# Altium PCB l2-l3-front.PcbDoc
Units mm, origin at the board's own origin, x right, y up, seen from the top; angles counter-clockwise.
Board outline 67.5 x 16.75 mm, 2 copper layers (Top Layer, Bottom Layer); 15 components, 19 nets, 77 pads, 39 vias.
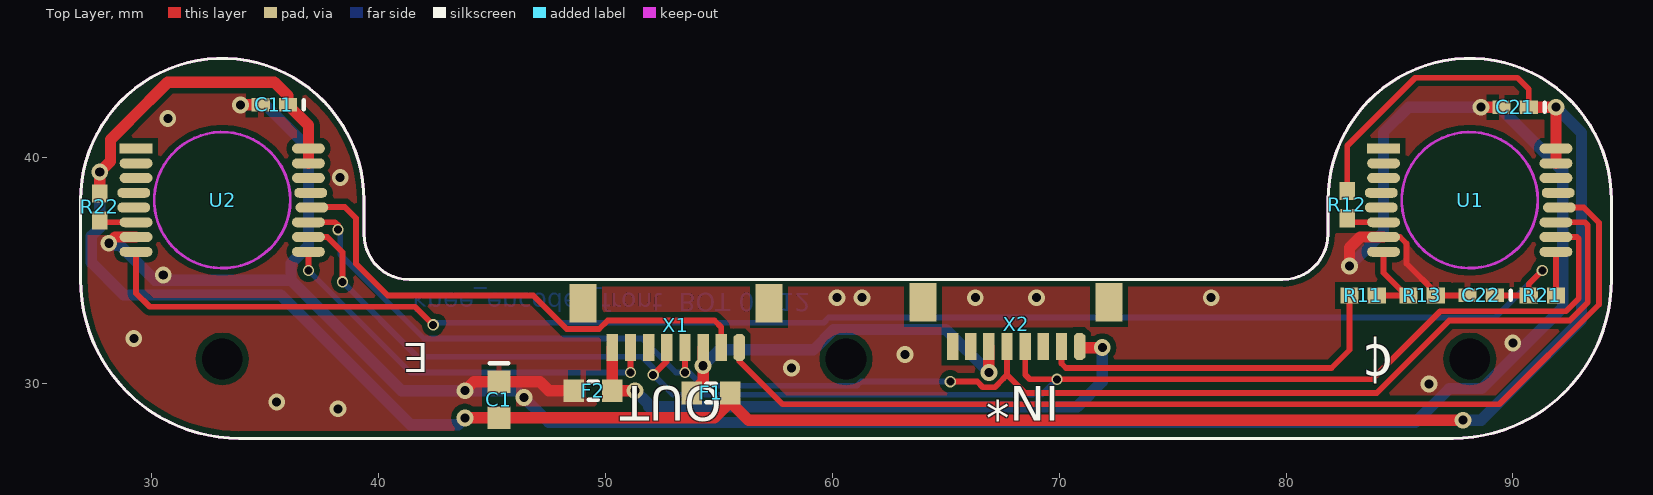
[diagram p0: Top Layer view]
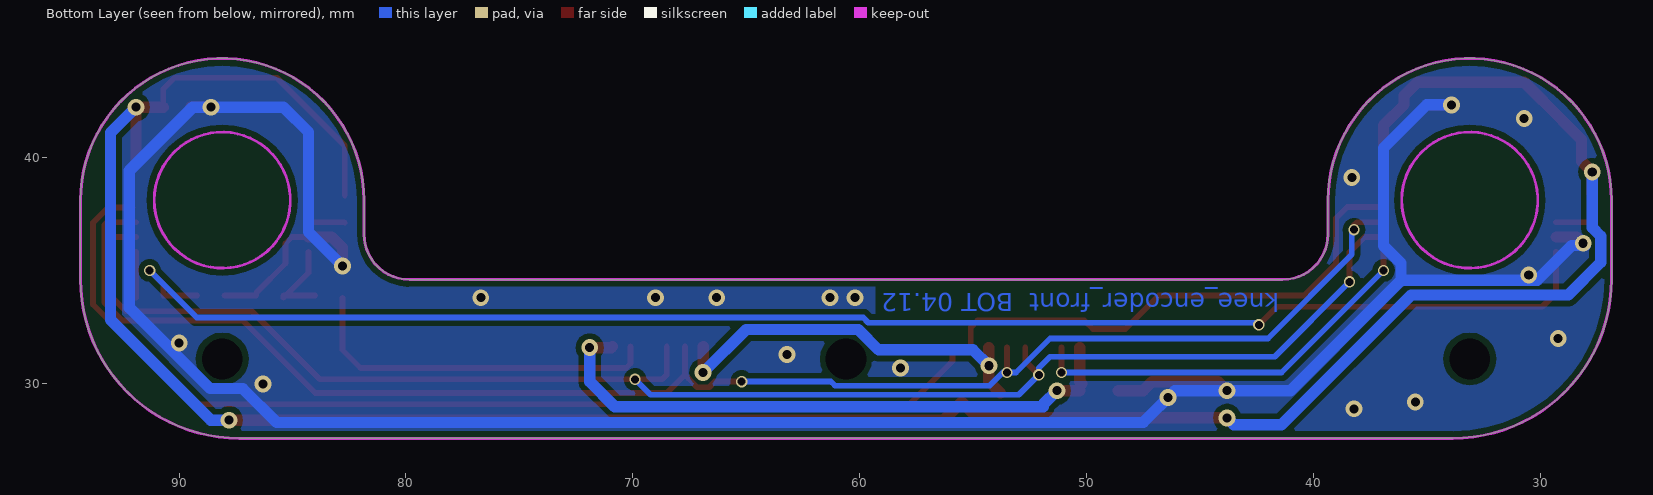
[diagram p1: Bottom Layer view, seen from below]

## Layer stack, top to bottom
Top Solder: solder mask 0.0102, Solder Resist, Dk 3.5
Top Layer: signal copper 0.0356
Dielectric1: dielectric 0.32, FR-4, Dk 4.8
Bottom Layer: signal copper 0.0356
Bottom Solder: solder mask 0.0102, Solder Resist, Dk 3.5

## Board outline
26.85,34.6 26.85,38.1 cw(c33.1,38.1) 39.35,38.1 39.35,36.6 ccw(c41.35,36.6) 41.35,34.6 79.85,34.6 ccw(c79.85,36.6) 81.85,36.6 81.85,38.1 cw(c88.1,38.1) 94.35,38.1 94.35,34.6 cw(c87.35,34.6) 87.35,27.6 33.85,27.6 cw(c33.85,34.6)

## Design rules (kind name [scope] priority, off if disabled: settings)
Clearance Clearance_Polygons [InPolygon] p1: gap=0.254
Clearance [All] p2: gap=0.15
HoleSize [All] p1: absolutevalues=TRUE maxlimit=6.2 minlimit=0.35 maxpercent=80.000 minpercent=20.000
MinimumSolderMaskSliver [All] p1: minsoldermaskwidth=0.15
PolygonConnect PolygonConnect_via [All vs IsVia] p1: connectstyle=Direct reliefconductorwidth=0.254 reliefentries=4 polygonreliefangle="90 Angle" airgapwidth=0.254
PolygonConnect [All] p2: connectstyle=Relief reliefconductorwidth=0.254 reliefentries=4 polygonreliefangle="90 Angle" airgapwidth=0.254
RoutingVias [All] p1: holewidth=0.5 width=0.8 viastyle="Through Hole" minholewidth=0.35 minwidth=0.5 maxholewidth=1.5 maxwidth=2
SilkToSilkClearance [All] p1 off: silktosilkclearance=0.254
SilkToSolderMaskClearance SilkscreenOverComponentPads [IsPad] p1 off: minsilkscreentomaskgap=0.254 clearancetoexposedcopper=TRUE
SolderMaskExpansion [All] p1: expansion=0
Width [All] p1: maxlimit=5 minlimit=0.15 preferedwidth=0.5
25 further rules are at their usual default settings.

## Components (designator, comment, footprint, x,y, rotation, side; value= is the part's Value field where it differs from the comment)
C1 "10uF" CAPC1608N 45.3,29.3 r270 top
C11 "100nF" CAPC1005N 35.4,42.3 r180 top
C21 "100nF" CAPC1005N 90.1,42.2 r180 top
C22 "1nF" CAPC1005N 88.6,33.9 r180 top
F1 "50mA, 1.5R" RESC1608N 54.65,29.6 r0 top
F2 "50mA, 1.5R" RESC1608N 49.45,29.7 r180 top
R11 "xR" RESC1005N 83.4,33.9 r0 top
R12 "xR" RESC1005N 82.7,37.9 r270 top
R13 "0R" RESC1005N 86,33.9 r180 top
R21 "100R" RESC1005N 91.3,33.9 r180 top
R22 "xR" RESC1005N 27.7,37.8 r270 top
U1 "AS5045" SSOP16 88.1,38.1 r0 top
U2 "AS5045" SSOP16 33.1,38.1 r0 top
X1 "SM08B-SURS" SM08B-SURS 53.1,31.6 r270 top
X2 "SM08B-SURS" SM08B-SURS 68.1,31.65 r270 top

## Footprints (in the part's own frame and the unit in brackets; to place one, negate y for a bottom-side part, rotate by r counter-clockwise, add the part's x,y. Pads: shape width x height; smd on the part's side, far side on the other; paste and mask are expansions set on the pad)
CAPC1005N [mm] "Chip Capacitor, Body 1.0x0.5mm, IPC Medium Density"
  rect 0.8x0.6 smd: 1(-0.6,0) 2(0.6,0)
  silkscreen extent -1.3,-0.2 -1.3,0.2, body extent -0.55,-0.3 0.55,0.3, height 0.6
CAPC1608N [mm] "Chip Capacitor, Body 1.6x0.8mm, IPC Medium Density"
  rect 1x1 smd: 1(-0.8,0) 2(0.8,0)
  silkscreen extent -1.6,-0.4 -1.6,0.4, body extent -0.87,-0.48 0.87,0.48, height 0.85
RESC1005N [mm] "Chip Resistor, Body 1.1x0.5mm, IPC Medium Density"
  rect 0.8x0.7 smd: 1(-0.6,0) 2(0.6,0)
  body extent -0.55,-0.3 0.55,0.3, height 0.4
RESC1608N [mm] "Chip Resistor, Body 1.6x0.8mm, IPC Medium Density"
  rect 0.9x1 smd: 1(-0.85,0) 2(0.85,0)
  silkscreen extent -0.2,-0.4 0.2,0.4, body extent -0.85,-0.48 0.85,0.48, height 0.6
SM08B-SURS [mm] "Wire-to-board connector, 8 pins, Body 8.6x2.7mm, Pitch 0.8mm, IPC Low Density"
  oct 1.2x0.5 smd: 1(0,2.8)
  rect 1.2x0.5 smd: 2(0,2) 3(0,1.2) 4(0,0.4) 5(0,-0.4) 6(0,-1.2) 7(0,-2) 8(0,-2.8)
  rect 1.7x1.2 smd: A(-1.95,4.1) B(-1.95,-4.1)
  body extent -2.45,-4.3 0.25,4.3, height 1.7
SSOP16 [mm] "16-Pin Shrink Small-Outline Package, Body 7.8x6.2mm, 0.65 mm Pitch, IPC Medium Density"
  rect 1.45x0.44 smd: 1(-3.8,2.275)
  oval 1.45x0.44 smd: 2(-3.8,1.625) 3(-3.8,0.975) 4(-3.9,0.325) 5(-3.9,-0.325) 6(-3.8,-0.975) 7(-3.8,-1.625) 8(-3.8,-2.275) 9(3.8,-2.275) 10(3.8,-1.625) 11(3.8,-0.975) 12(3.95,-0.325) 13(3.9,0.325) 14(3.8,0.975) 15(3.8,1.625) 16(3.8,2.275)
  body extent -2.8,-3.25 2.8,3.25, height 2

## Part data
C1 C11 C21 C22: library part Cap, "Capacitor"
F1 F2: library part "Fuse 1", "Ferrit Bead"
R11 R12 R13 R21 R22: library part Res1, "Resistor"
U1 U2: "12 Bit Programmable Magnetic Rotary Encoder"
X1 X2: "wire-to-board connector"

## Free pads (board coordinates)
  round 0 hole 1.8: 0(33.1,31.1) 0(60.6,31.1) 0(88.1,31.1)

## Via types
v1: diameter 0.74, hole 0.4, Top Layer to Bottom Layer, tented both sides, 29 vias
v2: diameter 0.5, hole 0.35, Top Layer to Bottom Layer, tented both sides, 10 vias

## Nets (pads, with @x,y where several pads share a name; then routed paths per layer and width w, separated by ;. In a path a pad name is that pad's centre, name@x,y a point inside that pad or via, vN(x,y) a via of type N, cw(c..) or ccw(c..) an arc to the next point about the centre after c; other vN are vias at no path point)
3.3V: C1.2 C11.1 C21.1 F1.2 R12.1 R22.1 U1.15 U1.16 U2.15 U2.16 | length 116.4
  Top Layer w0.254: R12.1@82.7,38.3 82.7,40.5 85.7,43.5 90.2,43.5 90.7,43 C21.1
  Top Layer w0.5: R22.1 v1(27.7,39.343) 28.175,39.818 28.175,40.761 29.014,41.6 29.014,41.614 30.7,43.3 35.4,43.3 36,42.7 C11.1 36.9,41.4 U2.16 U2.15 ; v1(43.8,28.5) C1.2 54.8,28.5 55.5,29.2 56.3,28.4 v1(87.8,28.4) ; C21.1 v1(91.9,42.2) U1.16 U1.15
  Bottom Layer w0.5: v1(27.7,39.343) 27.7,36.889 27.33,36.519 27.33,35.351 28.761,33.92 35.68,33.92 41.4,28.2 43.5,28.2 v1(43.8,28.5) ; v1(87.8,28.4) 88.6,28.4 93.03,32.83 93.03,41.07 v1(91.9,42.2)
C\S\: U1.11 U2.11 X1.4 X2.5 | length 69.7
  Top Layer w0.254: U2.11 38.075,37.125 38.2,37 v2(38.2,36.8) ; v2(53.5,30.5) X1.4 ; v2(65.2,30.1) 66.385,30.1 66.632,29.853 67.168,29.853 67.547,30.232 67.547,30.247 67.7,30.4 ; X2.5 67.7,30.4 ; U1.11 93.175,37.125 93.306,36.994 93.306,33.593 92.513,32.8 87.2,32.8 84,29.6 68.5,29.6 67.7,30.4
  Bottom Layer w0.254: v2(38.2,36.8) 38.3,36.7 38.3,35.7 42,32 51.6,32 53.1,30.5 v2(53.5,30.5) 53.685,30.5 54.262,29.923 61.088,29.923 61.269,30.104 65.196,30.104 v2(65.2,30.1)
DI: R11.1 X2.2 | length 16.2
  Top Layer w0.254: X2.2 70.1,30.9 70.3,30.7 82,30.7 82.8,31.5 R11.1@82.8,33.8
DO: U2.9 X1.7 | length 18
  Top Layer w0.254: v2(36.9,35) U2.9 ; v2(51.1,30.5) X1.7
  Bottom Layer w0.254: v2(36.9,35) 41.4,30.5 v2(51.1,30.5)
DO1: R21.1 U1.9 | length 2
  Top Layer w0.254: R21.1@91.9,33.8 U1.9
GND: C1.1 C11.2 C21.2 C22.2 F2.2 R13.1 U1.7 U2.7 | length 117.8
  Top Layer w0.254: U1.7 85.025,36.475 85.309,36.191 85.309,35.309 86.6,34.018 R13.1 C22.2
  Top Layer w0.5: v1(28.1,36.2) 28.375,36.475 U2.7 ; v1(33.9,42.3) C11.2 ; v1(43.8,29.7) 44.2,30.1 C1.1 47.1,30.1 47.5,29.7 F2.2 ; v1(82.8,35.2) 82.8,36 83.275,36.475 U1.7 ; v1(88.6,42.2) C21.2
  Bottom Layer w0.5: v1(28.1,36.2) 28,36.1 28.6,36.1 30.13,34.57 36.13,34.57 ; v1(33.9,42.3) 35,42.3 36.9,40.4 36.9,36.089 36.13,35.319 36.13,34.57 ; v1(82.8,35.2) 84.3,36.7 84.3,41.1 85.4,42.2 v1(88.6,42.2) 89.4,42.2 92.2,39.4 92.2,33.362 88.638,29.8 87.2,29.8 85.7,28.3 47.5,28.3 46.1,29.7 v1(43.8,29.7) 41,29.7 36.13,34.57
  other v1: 38.2,28.9 35.5,29.2 46.4,29.4 86.3,30 58.2,30.7 63.2,31.3 90,31.8 29.2,32 60.2,33.8 61.3,33.8 66.3,33.8 69,33.8 76.7,33.8 30.5,34.8 38.3,39.1 30.7,41.7
M\A\G\D\E\C\1\: U1.2
M\A\G\D\E\C\2\: U2.2
M\A\G\I\N\C\1\: U1.1
M\A\G\I\N\C\2\: U2.1
MODE1: R12.2 U1.6 | length 1.6
  Top Layer w0.254: R12.2@82.7,37.1 82.725,37.125 U1.6
MODE2: R22.2 U2.6 | length 1.6
  Top Layer w0.254: R22.2 27.775,37.125 U2.6
PROG_DI1: R11.2 R13.2 U1.8 | length 3.9
  Top Layer w0.254: R11.2 R13.2 ; U1.8 84.3,34.9 R13.2@85.4,33.8
PROG_DI2: C22.1 R21.2 U2.8 | length 68.1
  Top Layer w0.254: U2.8 29.3,34 29.9,33.4 41.6,33.4 v2@42.3,32.7 ; C22.1 R21.2 90.7,34.4 v2(91.3,35)
  Bottom Layer w0.254: v2@42.4,32.7 59.616,32.7 59.843,32.927 89.227,32.927 v2(91.3,35)
  other v2: 42.4,32.6
PWM1: U1.12 X1.1 | length 46.7
  Top Layer w0.254: X1.1 55.9,31 57.8,29.1 89.4,29.1 93.8,33.5 93.8,37.1 93.125,37.775 U1.12
PWM2: U2.12 X1.2 | length 22.5
  Top Layer w0.254: U2.12@37.2,37.8 38.5,37.8 39,37.3 39,35.3 40.4,33.9 46.808,33.9 48.285,32.423 49.715,32.423 50.092,32.8 54.8,32.8 55.1,32.5 X1.2
SCLK: U1.10 U2.10 X1.5 X2.4 | length 69.4
  Top Layer w0.254: U2.10 37.725,36.475 38.4,35.8 v2(38.4,34.5) ; v2(52.1,30.4) 52.7,31 X1.5 ; X2.4 68.5,30.4 68.7,30.2 83.8,30.2 86.804,33.204 92.346,33.204 92.902,33.76 92.902,36.398 92.825,36.475 U1.10
  Bottom Layer w0.254: v2(38.4,34.5) 41.7,31.2 51.6,31.2 52.1,30.7 v2(52.1,30.4) 52.981,29.519 69.219,29.519 v2(69.9,30.2)
VDD: F1.1 X1.3 X2.6 | length 17.4
  Top Layer w0.5: F1.1 54.3,30.1 X1.3 ; v1(66.9,30.5) X2.6
  Bottom Layer w0.5: v1(54.3,30.8) 55,31.5 59.162,31.5 60.062,32.4 65,32.4 v1(66.9,30.5)
VSS: F2.1 X1.8 X2.1 | length 26.6
  Top Layer w0.5: F2.1@50.2,30 50.3,30.1 X1.8 ; F2.1 v1(51.3,29.7) ; X2.1 70.95,31.6 v1(71.9,31.6)
  Bottom Layer w0.5: v1(51.3,29.7) 51.9,29.1 51.9,28.992 70.792,28.992 71.9,30.1 v1(71.9,31.6)
pads on no net: U1.3 U1.4 U1.5 U1.13 U1.14 U2.3 U2.4 U2.5 U2.13 U2.14 X1.6 X1.A X1.B X2.3 X2.7 X2.8 X2.A X2.B

## Polygon pours and split planes (outlines as drawn)
GND on Top Layer "TOPGND" (solid, remove dead copper, pour order 4): 26.5,44.5 26.5,27.5 94.3,27.5 94.5,27.3 94.4,27.4 94.4,44.6
GND on Bottom Layer "BOTGND" (solid, remove dead copper, pour order 3): 26.5,44.5 26.5,27.5 94.3,27.5 94.5,27.3 94.4,27.4 94.4,44.6

## Keep-outs
Keep-Out Layer:
  circle w0.127: c33.1,38.1 r3
  circle w0.127: c88.1,38.1 r3
  lines w0.127: 26.85,34.6 ccw(c33.85,34.6) 33.85,27.6 87.35,27.6 ccw(c87.35,34.6) 94.35,34.6 94.35,38.1 ccw(c88.1,38.1) 81.85,38.1 81.85,36.6 cw(c79.85,36.6) 79.85,34.6 41.35,34.6 cw(c41.35,36.6) 39.35,36.6 39.35,38.1 ccw(c33.1,38.1) 26.85,38.1 26.85,34.6

## Other copper
Bottom Layer:
  text "knee_encoder_front  BOT 04.12" at 41.5,34 h0.8 r180

## Silkscreen, mask and mechanical layers (free items; w line width, h text height)
Top Overlay:
  the board outline again, w0.127
  text "¢" at 84.8,32.277 h3 r180
  text "E" at 42.2,32.205 h2.2 r180
  text "OUT" at 55.131,29.9 h1.52 r180
  text "IN*" at 70.004,29.9 h1.52 r180
Mechanical 1:
  circle w0.127: c33.1,38.1 r3.05
  circle w0.127: c88.1,38.1 r3.05
  lines w0.127: 26.85,34.6 ccw(c33.85,34.6) 33.85,27.6 87.35,27.6 ccw(c87.35,34.6) 94.35,34.6 94.35,38.1 ccw(c88.1,38.1) 81.85,38.1 81.85,36.6 cw(c79.85,36.6) 79.85,34.6 41.35,34.6 cw(c41.35,36.6) 39.35,36.6 39.35,38.1 ccw(c33.1,38.1) 26.85,38.1 26.85,34.6
Mechanical 3:
  circle w0.1: c33.1,31.1 r1.5
  circle w0.1: c60.6,31.1 r1.5
  circle w0.1: c88.1,31.1 r1.5

## Dimensions
26.85,34.6 to 94.35,34.6 on Mechanical 1
88.1,44.35 to 87.35,27.6 on Mechanical 1
33.1,31.1 to 33.85,27.6 on Mechanical 1
33.1,31.1 to 26.85,34.6 on Mechanical 1